# Altium PCB Handheld Logger Bud HH3642 rev2.PcbDoc (part 2 of 2)
Units mil, origin at the board's own origin, x right, y up, seen from the top; angles counter-clockwise.
Board outline 2140 x 3050 mil, 2 copper layers (Top Layer, Bottom Layer); 81 components, 89 nets, 390 pads, 239 vias.
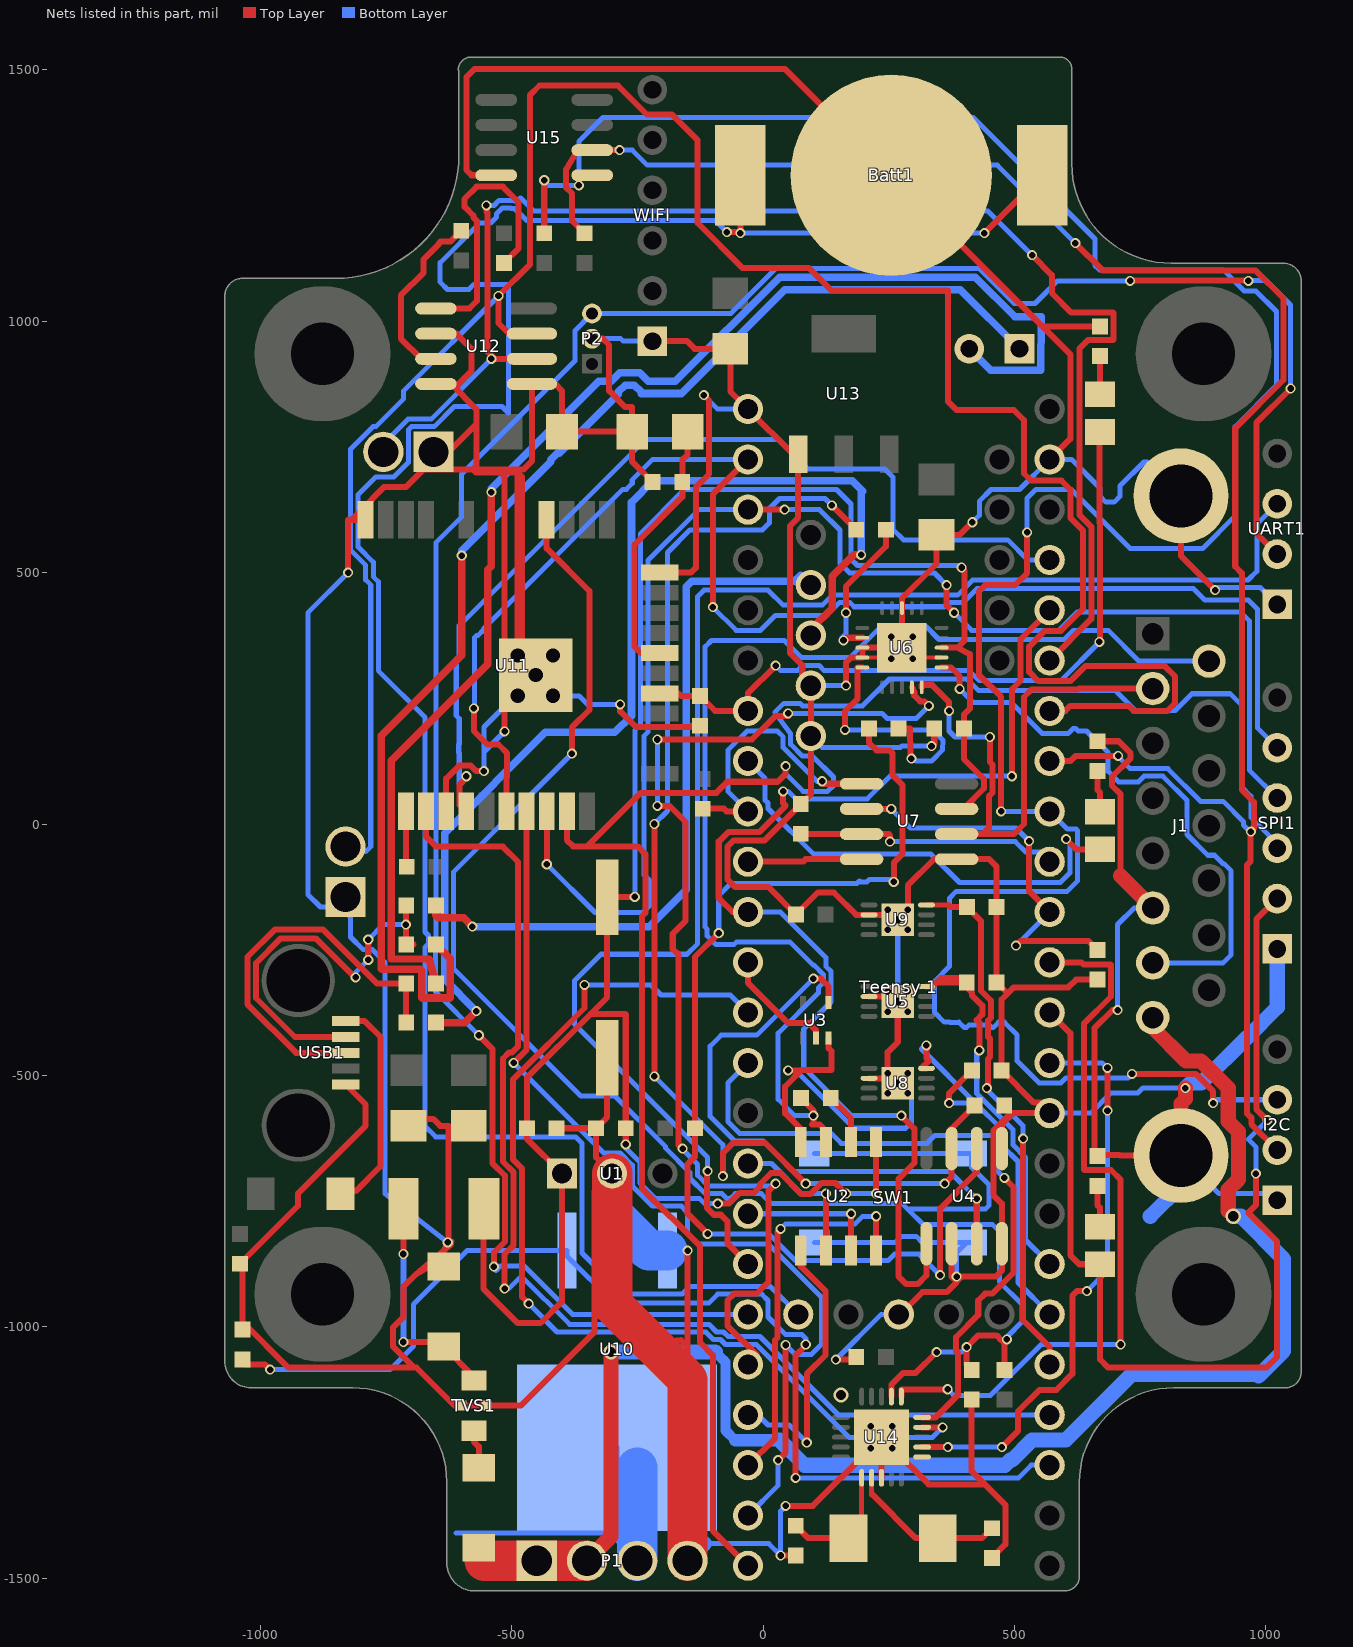
[diagram p2: the nets of this part, all layers, seen from the top]

## Via types
v1: diameter 20, hole 13, Top Layer to Bottom Layer, 226 vias
v2: diameter 50, hole 28, Top Layer to Bottom Layer, 10 vias
v3: diameter 30, hole 20, Top Layer to Bottom Layer, 3 vias

## Nets (pads, with @x,y where several pads share a name; then routed paths per layer and width w, separated by ;. In a path a pad name is that pad's centre, name@x,y a point inside that pad or via, vN(x,y) a via of type N, cw(c..) or ccw(c..) an arc to the next point about the centre after c; other vN are vias at no path point) (continued)
GND: "Teensy 1.14" "Teensy 1.17" "Teensy 1.32" "Teensy 1.78" "Teensy 1.79" "Teensy 1.90" Batt1.2 C1.1 C2.1 C3.2 C4.2 C5.1 C6.1 C7.2 C8.1 C9.1 C10.2 C11.1 C12.1 C13.1 C14.1 C15.1 C16.1 C17.1 I2C.1 J1.6 J1.16 J1.17 P1.4 P2.2 R2.2 R3.2 R7.2 R8.2 R9.2 R11.2 R12.2 R13.2 R17.2 R19.2 R26.2 SPI1.1 SW1.3 SW1.4 SW20.1 SW21.1 TVS1.3 U1.2 U2.8 U3.3 U4.2 U4.4 U4.5 U5.0 U5.2 U6.3 U6.4 U6.12 U6.18 U6.21 U7.5 U8.0 U8.2 U9.0 U9.2 U10.3 U11.9 U11.12 U11.28 U11.29 U12.2 U12.4 U12.5 U13.1 U14.8 U14.21 U15.4 UART1.1 USB1.4 WIFI.1 Z1.1 | length 24703.8
  Top Layer w7.87: U6.4@197.52,330.94 U6.21@254.61,330.94 ; U6.21@297.91,330.94 U6.12@355,330.94
  Top Layer w12: C4.2@-1040,-874.53 -925,-759.53 -925,-735 -790,-600 -790,-557.83 USB1.4@-829.84,-517.99 USB1.4@-837,-517.99 ; C4.2@-1035,-890 -1035,-990 -944,-1081 -693.7,-1081 ; v1(-825,500) -825,604 -824,605 -817.88,605 ; U11.9@-790.24,604.92 -790.24,605 -817.88,605 ; C2.1@-705,-600.12 -705,-586.3 -656,-586.3 -642.19,-600.12 -625,-600.12 v1@-625,-830 ; U12.4@-650.47,875 U12.4@-620,875 ; U12.2@-650.47,975 -610,975 -580,945 -580,900 -605,875 U12.4@-620,875 ; U11.12@-630,25 -630,90 -604,116 -581.3,116 -570.3,105 v1(-555,105) ; v1(-626.95,-832) -633.56,-847.1 ; v1@-619,-830 -620,-831 -620,-835.47 -622.29,-837.43 -633.56,-847.1 ; U15.4@-530.47,1290 -579.5,1290 -590,1300.5 -590,1485 -574,1501 44,1501 Batt1.2@255,1290 555.47,989.53 ; v1(-514,184) -514,254.96 -514,690 -523,699 ; v2(-487.68,254.96) v2(-487.68,334.96) -487.68,698.68 ; U11.29@-479,343.64 -479,690 -487.68,698.68 ; U11.29@-451.97,295.87 -411.1,255 -411.14,254.96 v2(-417.68,254.96) ; C10.2@-410.47,-605 C1.1@-332.03,-605 ; P2.2@-340,965 -318.5,965 -306,952.5 -306,861.3 -273.7,829 -260.12,829 C5.1@-260.12,780 ; C3.2@-310,-464.45 -310,-582.97 C1.1@-332.03,-605 ; -300,-992 -300,-955 U1.2@-300,-695 ; v1(-284,238) -284,224 -253,193 -144,193 -141.53,195.47 R17.2@-125,195.47 ; -222.78,-1032.22 -163.5,-1026 -150,-1039.5 ; WIFI.1@-220,960 -151,960 -135.88,944.88 C17.1@-65,944.88 -65,860 -30,825 60,735 U13.1@70,735 70,609 54,593 54,339.74 78,315.74 78,292 95,275 95,175 95,59.53 R8.2@75,39.53 2.47,-33 -59,-33 -71,-45 -71,-110 -56,-125 10.47,-125 C8.1@65.47,-180 109.22,-136.25 140.62,-136.25 185,-180.63 U9.2@210.83,-180.63 253,-180.63 253,-190.47 U9.0@267.91,-190.47 ; C11.1@-219.53,680 -260.12,720.59 C5.1@-260.12,780 ; U11.28@-205.12,499.8 -143.48,499.8 -133.72,509.56 -133.72,669.36 -107.38,695.7 -107.38,842.38 v1(-117.62,852.62) ; P1.4@-150,-1465 -150,-1105 -150,-1039.5 ; v1(-150,-848.27) -150,-1039.5 ; v1(35.03,-1454.53) C14.1@65,-1454.53 ; v1(45,-1356) 98.92,-1356 v1(213.98,-1240.94) U14.21@235.63,-1219.29 U14.8@235.63,-1300 ; v1(50,-490) 76,-490 ; U2.8@75,-632.13 75,-606.17 44,-575.17 44,-522 76,-490 ; U3.3@130.59,-425.43 130.59,-446 136,-451.41 136,-489 77,-489 76,-490 ; v1(145,-1065) 180.47,-1065 C9.1@185.47,-1060 ; v1(165,275) 165,320.94 175,330.94 U6.4@197.52,330.94 U6.3@197.52,350.63 U6.21@276.26,350.63 U6.18@276.26,429.37 276.26,448.32 345,517.06 C7.2@345,574.88 391,574.88 v1(416.12,600) ; U8.2@210.83,-505.63 U8.0@247.91,-505.63 ; U5.2@210.83,-343.13 258.07,-343.13 U5.0@267.91,-352.97 267.91,-433.59 247.91,-453.59 v1(247.91,-495.47) ; v1(257.28,-1240.94) 329.34,-1313 441,-1313 ; 270,-975 273.1,-975 317.1,-931 365,-931 385,-911 v1@385,-909.53 ; v1(287.91,-170.47) 287.91,-122 339.91,-70 U7.5@385,-70 449.53,-70 464.53,-85 R13.2@464.53,-165 R11.2@464.53,-315 ; v1@340.47,159.53 C6.1@340.47,190 ; U4.2@375,-834.49 v1@375,-900 ; C15.1@415,-1144.53 415,-1287 441,-1313 ; C13.1@455,-1459.53 482,-1432.53 482,-1354 441,-1313 ; R11.2@464.05,-315 R11.2@464.53,-315 ; U4.5@475,-645.51 475,-597.5 497.5,-575 ; 570,725 611,766 611,934 555.47,989.53 ; R3.2@665,-660.47 R3.2@667.24,-658.24 ; R9.2@665,-309.53 622.47,-309.53 607,-325 498.5,-325 486.51,-336.99 ; R2.2@665,164.53 707,164.53 731,140.53 731,130.7 694,93.7 694,76.3 711,59.3 711,-102.89 ; R19.2@670,989.53 555.47,989.53 ; v1(705,-370) 695,-370 659,-406 659,-650 R3.2@667.24,-658.24 ; J1.17@830.91,-659.21 709.72,-659.21 708.75,-658.24 R3.2@667.24,-658.24 ; 830.91,-556.09 840,-547 ; J1.16@830.91,652.6 830.91,533.09 v1(899,465) ; -817.88,605 -776.98,645.89 -776.98,646.88 -753.86,670 -710,670 -675,705 SW21.1@-660,705 ; -693.7,-1081 -736,-1038.7 -736,-1001.48 -715,-980.48 -715,-920.47 -690,-895.47 ; -693.7,-1081 -689,-1081 -613.5,-1156.5 TVS1.3@-600,-1156.5 TVS1.3@-550,-1156.5 -481.5,-1156.5 -335,-1010 -335,-730 U1.2@-300,-695 ; -690,-895.47 -650.65,-861.74 -633.56,-847.1 ; -690,-895.47 -642.5,-867.33 -642.4,-867.28 -633.56,-847.1 ; SW21.1@-660,705 -577,705 ; SW21.1@-660,705 -570,795 ; U12.4@-620,875 -570,825 -570,795 ; -577,705 -529,705 ; -577,705 -571,699 -523,699 ; -577,705 -570,712 -570,795 ; -529,705 -476,705 -459.53,721.47 U12.5@-459.53,875 -413.5,875 -399.88,861.38 C16.1@-399.88,780 C5.1@-260.12,780 ; -529,705 -523,699 ; -523,699 -488,699 -487.68,698.68 ; C1.1@-332.03,-605 -332.03,-662.97 U1.2@-300,-695 ; v1@375,-900 384.76,-909.76 v1@385,-909.53 ; v1@375,-900 v1(385,-900) ; v1@385,-909.53 v1@394.53,-900 ; v1@385,-909.53 v1(385,-900) ; v1(385,-900) v1@394.53,-900 ; v1@394.53,-900 463,-900 475,-888 U4.4@475,-834.49 475,-755 458,-738 458,-609.75 492.75,-575 497.5,-575 ; R11.2@464.53,-315 486.51,-336.99 ; 486.51,-336.99 474.53,-348.97 R12.2@474.53,-490 538.53,-554 570,-554 570,-575 497.5,-575
  Top Layer w30: 711,-102.89 J1.6@775,-166.89 ; J1.17@830.91,-659.21 830.91,-556.09 ; 840,-547 v1(840,-525)
  Top Layer w80: U1.2@-300,-695 -300,-955 -150,-1105 P1.4@-150,-1465
  Bottom Layer w10: v1(-825,500) -905,420 -905,-140 -879.79,-165.21 -840,-165.21 -820.21,-185 -820.21,-224.79 -795,-250 -776.72,-250 -752,-274.72 -752,-735 v1(-626.95,-832) ; v1(-555,105) -555,143 ; v1(-514,184) -555,143 ; v2(-487.68,254.96) v2(-417.68,254.96) -365.96,254.96 -349,238 v1(-284,238) ; U11.29@-479,343.64 -473.36,349.28 -432,349.28 v2(-417.68,334.96) ; U11.29@-451.97,295.87 -555,192.83 -555,143 ; P2.2@-340,965 -283,965 -278,960 WIFI.1@-220,960 ; U10.3@-190,-848.27 v1(-150,-848.27) ; v1(-117.62,852.62) -90,825 -30,825 ; -116,-1431 11.5,-1431 v1(35.03,-1454.53) 35.03,-1365.97 v1(45,-1356) ; v1(50,-490) 65.32,-490 180.32,-605 283.28,-605 295,-593.28 295,-542.56 v1(287.91,-535.47) U8.0@277.83,-525.39 ; 95,175 117.5,152.5 273.13,152.5 275.89,155.26 276.15,155 v1(335,155) 336.51,155 v1@338,153.51 ; 95,275 v1(165,275) ; SW1.4@102.01,-832.17 263.34,-832.17 275.5,-820 304.5,-820 316.66,-832.17 SW1.3@405,-832.17 ; v1(145,-1065) 235,-975 270,-975 ; v1(213.98,-1240.94) v1(257.28,-1240.94) ; v1(213.98,-1197.64) v1(257.28,-1197.64) ; v1(247.91,-535.47) U8.0@267.91,-515.47 ; v1(247.91,-495.47) 274.47,-495.47 281.19,-502.19 U8.0@267.91,-515.47 ; v1(247.91,-372.97) U5.0@267.91,-352.97 ; v1(247.91,-332.97) U5.0@267.91,-352.97 ; v1(254.61,328.98) v1(297.91,328.98) v1(297.91,372.28) v1(254.61,372.28) ; U8.0@287.91,-525.39 U8.0@277.83,-525.39 ; v1(287.91,-170.47) U9.0@267.91,-190.47 U5.0@267.91,-352.97 ; v1(385,-900) 385,-852.17 SW1.3@405,-832.17 ; SW1.3@415,-832.17 SW1.3@405,-832.17 ; v1(416.12,600) 430,613.88 430,641.57 453.43,665 510,665 570,725 613.28,725 670,668.28 670,651.72 681.72,640 698.28,640 710,651.72 710,672.39 757.61,720 763.5,720 J1.16@830.91,652.6 ; 570,-575 651.72,-575 691.72,-535 745.19,-535 755.19,-525 v1(840,-525) ; v1(705,-370) 705,-200 738.11,-166.89 J1.6@775,-166.89 ; J1.17@830.91,-719.09 J1.17@830.91,-659.21 906.69,-735 1009.14,-735 I2C.1@1022.44,-748.31 ; v1(899,465) 904,470 989.14,470 UART1.1@1022.44,436.69 ; U8.0@267.91,-515.47 U8.0@277.83,-525.39 ; U8.0@267.91,-515.47 267.91,-525.39 U8.0@277.83,-525.39
  Bottom Layer w30: P1.4@-150,-1465 -116,-1431 ; 770,-780 J1.17@830.91,-719.09 ; v1(840,-525) 850,-515 871.36,-515 963.05,-423.31 963.69,-423.31 1022.44,-364.56 SPI1.1@1022.44,-248.31
  Bottom Layer w60: -300,-775 U1.2@-300,-695
  Bottom Layer w80: -300,-775 -226.73,-848.27 U10.3@-190,-848.27
  other v1: 247.91,-495.47 287.91,-495.47 287.91,-372.97 287.91,-332.97 247.91,-210.47 287.91,-210.47 247.91,-170.47 -487.68,254.96 -417.68,254.96 -417.68,334.96
  other v3: 155,-1135
"GPS RX": "Teensy 1.41" P2.3 UART1.2 | length 4684.5
  Top Layer w12: v1(-565,-420) -538,-447 -538,-674.44 -513,-699.44 -513,-830.56 -535,-852.56 v1(-535,-880) ; v1(730,1080) 731,1081 964,1081 v1(965,1080) ; UART1.2@1022.44,536.69 981,578.14 981,798 v1(1049,866)
  Bottom Layer w10: v1(-565,-420) -651,-334 -651,-245.5 -650,-244.5 -650,-215.5 -650.5,-215 -650.5,-10.75 -650,-10.25 -650,560 -600,610 -600,695 -374,921 -374,981 P2.3@-340,1015 -64.1,1015 25.9,1105 429.29,1105 499.29,1035 540.71,1035 585.71,1080 v1(730,1080) ; v1(-535,-880) -535,-883.72 -531,-887.72 -522.28,-879 -485,-879 -480,-874 -379,-975 -30,-975 ; v1(965,1080) 966,1081 1000,1081 1049,1032 v1(1049,866)
"GPS TX": "Teensy 1.40" UART1.3 | length 2989.6
  Top Layer w12: v1(-110,-690.3) -111,-691.3 -111,-763.7 -97.7,-777 -84,-777 -71,-790 -71,-834 -30,-875
  Bottom Layer w10: v1(-110,-690.3) -110,-663 -375,-398 -375,-311.72 -322.28,-259 -151,-259 -130,-238 -130,452.5 -117.5,465 10,465 40,435 118,435 138,455 387,455 417,485 964.5,485 982,502.5 982,596.25 UART1.3@1022.44,636.69
"Hst USB_N": "Teensy 1.76" R14.1 | length 1424.5
  Top Layer w15: R14.1@-650.47,-162.33 -650.47,-181.53 -645.47,-186.53 -595.47,-186.53 v1(-578,-204)
  Bottom Layer w15: v1(-578,-204) -226,-204 -152.5,-130.5 -152.5,471.62 -141.62,482.5 62.5,482.5 75,495 95,475
"Hst USB_P": "Teensy 1.77" R15.1 | length 2187.5
  Top Layer w15: R15.1@-650.47,-395 -593,-395 v1(-570,-372) ; 95,375 95,386.82 137.5,429.32 137.5,492.5 180,535 v1(195,535)
  Bottom Layer w15: v1(-570,-372) -633,-309 -633,-252.25 -632.5,-251.75 -632.5,-208.25 -633,-207.75 -633,-18 -433,182 -294.5,182 -261.5,215 -261.5,640.19 -219.19,682.5 177.25,682.5 198,661.75 195,658.75 v1(195,535)
"J1708 RX": "Teensy 1.4" "Teensy 1.29" U4.1 | length 2363.3
  Top Layer w12: -30,-175 -60.5,-175 -88,-147.5 -88,-35 -69,-16 -7.5,-16 45,36.5 40,41.5 v1(40,65) ; v1(275,-580) 301,-606 301,-674 269,-706 269,-899 285,-915 307.5,-915 325,-897.5 U4.1@325,-834.49 ; v1(495,95) 495,268 512,285 512,367 570,425
  Bottom Layer w10: -30,-175 34.5,-175 125,-265.5 125,-283 135,-293 135,-353.99 81,-407.99 81,-484.28 176.72,-580 v1(275,-580) ; v1(40,65) 50,65 65,50 207.5,50 252.5,95 v1(495,95)
"J1708 TX": "Teensy 1.3" U3.2 | length 230.4
  Top Layer w12: -30,-275 -30,-316 49.57,-395.57 90.57,-395.57 105,-410 U3.2@105,-425.43
J1708+: R5.2 U6.5 | length 529.4
  Top Layer w12: v1(163,187) 163,224 188,249 188,311.26 U6.5@197.52,311.26 ; R5.2@269.53,190 292,190 293,138 295,136 v1(295,130)
  Bottom Layer w10: v1(163,187) 337.5,187 358,166.5 357.35,147.35 335,125 304,125 295,134 v1(295,130)
J1708-: R6.2 U6.2 | length 298
  Top Layer w12: v1(160,365) 165.32,370.32 U6.2@197.52,370.32 ; v1(165,420) 165,472.53 244.53,552.06 R6.2@244.53,585
  Bottom Layer w10: v1(160,365) 156,369 165,378 v1(165,420)
LIN: J1.2 U6.10 U7.6 | length 1077.4
  Top Layer w12: U6.10@315.63,271.89 315.63,276 336.5,276 370,242.5 v1(370,225) ; U7.6@385,-20 436.5,-20 ; v1(451,173) 451,123.31 456.31,118 456.31,62.31 449,55 449,-7.5 436.5,-20 ; J1.2@775,269.33 628,269.33 625.67,267 533.5,267 519,252.5 519,0 499,-20 436.5,-20
  Bottom Layer w10: v1(370,225) 370,185 369.8,184.8 381.59,173 v1(451,173)
"LIN1 RX": "Teensy 1.6" R10.1 U7.1 | length 568.2
  Top Layer w12: R10.1@-120,30.47 -78,30.47 -72.53,25 -30,25 ; v1(117.5,85) 122.5,80 U7.1@196.02,80
  Bottom Layer w10: -30,25 -70,65 -70,146.64 -31.64,185 28.28,185 40,173.28 40,152.22 107.22,85 v1(117.5,85)
"LIN1 TX": "Teensy 1.5" U7.4 | length 228.1
  Top Layer w12: -30,-75 80,-75 85,-70 U7.4@196.02,-70
"LIN !WAKE": "Teensy 1.24" R8.1 U7.3 | length 525.3
  Top Layer w12: R8.1@75,-19.53 124.72,-19.53 125.19,-20 U7.3@196.02,-20 250,-20 252.5,-22.5 v1(252.5,-35)
  Bottom Layer w10: v1(252.5,-35) 501.72,-35 522.05,-55.34 550.34,-55.34 570,-75
"LIN CS": "Teensy 1.23" R9.1 U7.2 | length 785.2
  Top Layer w12: U7.2@196.02,30 v1(255,30) ; v1(503,-242) 512,-233 647.53,-233 R9.1@665,-250.47 ; v1(529,-34) 529,-134 570,-175
  Bottom Layer w10: v1(255,30) 293,-8 503,-8 v1(529,-34) ; v1(503,-242) 570,-175
"LIN Switch": "Teensy 1.42" U6.9 | length 2196.3
  Top Layer w12: v1(-210,36) -186,36 -154,4 -154,-192.72 -179.5,-218.22 -179.5,-248.5 -167.78,-260.22 -167.78,-637.78 v1(-160,-645.56) ; v1(-210,168) -22,168 25,215 v1@50.3,215 ; -30,-1075 -11.75,-1056.75 -71,-997.5 -71,-947.5 -57.5,-934 -13,-934 11,-910 11,-729 v1(25,-715) ; U6.9@295.94,271.89 298.63,269.2 298.63,264.85 300.69,262.79 300.69,255.86 312.55,244 321,244 v1(330,235)
  Bottom Layer w10: v1(-210,36) v1(-210,168) ; v1(-160,-645.56) -160,-646.86 -130,-676.86 -130,-698.58 -108.58,-720 24,-720 25,-719 v1(25,-715) ; v1@50.3,215 v1(50,220) 236.72,220 246.72,210 305,210 v1(330,235)
NetBatt1_1: "Teensy 1.15" Batt1.1 | length 4637.8
  Top Layer w12: v1(-72,1177) -46,1177 v1@-45,1178 ; v1(-45,1175) v1@-45,1178 ; Batt1.1@-45,1290 v1@-45,1178 ; v1(440,1175) Batt1.1@555,1290
  Bottom Layer w10: v1(-72,1177) -95,1200 -470,1200 -494,1224 -500.72,1224 -501.72,1225 -518.28,1225 -530,1213.28 -530,1206.72 -541.72,1195 -563,1195 -642,1116 -642,1077.5 -627.5,1063 -585,1063 -575,1073 -507,1073 -506,1072 -506,817 -519,830 -613.79,830 -653.79,790 -699.14,790 -705,784.14 -705,719.29 -734.29,690 -770,690 -805,655 -805,550.71 -775,520.71 -775,491.72 -765,481.72 -765,305 -672,212 -672,-214.72 -665,-221.72 -665,-238.28 -672,-245.28 -672,-601 -651,-622 -373,-622 -360,-635 -360,-853 -278,-935 -161,-935 -146,-920 15,-920 70,-975 ; v1(-45,1175) v1(440,1175)
NetC5_2: C5.2 C11.2 U11.24 | length 526.6
  Top Layer w12: U11.24@-205.12,339.8 -242.61,339.8 -255.3,352.5 -255.3,555.7 -160.47,650.53 C11.2@-160.47,680 -160.47,724 -149.88,734.59 C5.2@-149.88,780
NetC13_2: C13.2 U14.7 X1.1 | length 315.6
  Top Layer w9.84: U14.7@215.94,-1300 215.94,-1332 216.94,-1333
  Top Layer w12: 216.94,-1333 303.94,-1420 X1.1@347.17,-1420 435.47,-1420 C13.2@455,-1400.47
NetC14_2: C14.2 U14.6 X1.2 | length 246
  Top Layer w9.84: X1.2@196.26,-1393.74 U14.6@196.26,-1300
  Top Layer w12: C14.2@65,-1395.47 89.53,-1420 X1.2@170,-1420 X1.2@196.26,-1393.74
NetC15_2: C15.2 R23.2 SW1.1 SW1.2 U11.4 U14.17 | length 3600
  Top Layer w10: v1@475,-1025 v1(485,-1025)
  Top Layer w12: U11.4@-430.24,604.92 -430.24,548.24 -345,463 -345,227 -380,192 v1(-380,140) ; U14.17@255.32,-1138.58 255.32,-1114.68 278.08,-1091.92 303.08,-1091.92 v1(345,-1050) ; C15.2@415,-1085.47 405,-1075.47 v1(405,-1040) 428,-1017 464.41,-1017 473.7,-1026.3 ; v1@478.7,-1031.3 480,-1032.59 R23.2@480,-1085.47
  Bottom Layer w10: v1(-380,140) -615,-95 -615,-288 -362.3,-540.7 -294.59,-540.7 -194.28,-641 -194.28,-644 -145,-693.28 -145,-704.8 -114.8,-735 -81.72,-735 -71.72,-745 -65.5,-745 -55.5,-735 -3.28,-735 16.72,-755 277,-755 288,-766 ; SW1.2@102.01,-655 SW1.1@415,-655 415,-683 449,-717 449,-759 442,-766 288,-766 ; v1(345,-1050) 395,-1050 v1(405,-1040) ; v1(485,-1025) 485,-1020 515,-990 515,-955 470,-910 470,-810 456,-796 318,-796 288,-766
NetD1_1: "Teensy 1.7" D1.1 | length 926.1
  Top Layer w12: v1(602.5,-30) 622.9,-50.4 D1.1@670,-50.4
  Bottom Layer w10: -30,125 4.39,90.61 4.39,47.18 10,41.57 10,31 101,-60 334,-60 390.5,-116.5 591,-116.5 610,-97.5 610,-37.5 v1(602.5,-30)
NetD1_2: D1.2 R2.1 | length 83.1
  Top Layer w12: R2.1@665,105.47 665,68 670,63 D1.2@670,24.4
NetD2_1: "Teensy 1.21" D2.1 SPI1.2 | length 2112.2
  Top Layer w12: 570,-375 611,-416 611,-857.4 629,-875.4 D2.1@670,-875.4 670,-1064.5 686.5,-1081 1001,-1081 1022,-1060 1022,-830 965,-773 980,-758 v1(980,-695) ; v1(1003,-589) 981,-567 981,-189.75 SPI1.2@1022.44,-148.31
  Bottom Layer w10: v1(980,-695) 980,-642 965,-627 v1(1003,-589)
NetD2_2: D2.2 R3.1 | length 83.1
  Top Layer w12: R3.1@665,-719.53 665,-758 670,-763 D2.2@670,-800.6
NetD3_2: D3.2 TVS1.1 | length 77.6
  Top Layer w12: TVS1.1@-575,-1206.5 -575,-1228 -565,-1238 D3.2@-565,-1280
NetD4_1: "Teensy 1.8" D4.1 R17.1 U11.22 | length 1417.8
  Top Layer w12: U11.22@-205.12,259.8 -168,259.8 -162.72,254.53 R17.1@-125,254.53 -95.47,225 -30,225 -30,260 v1(25,315) ; v1(669,362) 670,363 670,597.78 669,598.78 669,778.6 D4.1@670,779.6
  Bottom Layer w10: v1(25,315) 35,305 68.43,305 78.43,315 111.57,315 121.57,305 410,305 430,285 592,285 v1(669,362)
NetD4_2: D4.2 R19.1 | length 76.1
  Top Layer w12: D4.2@670,854.4 R19.1@670,930.47
NetD5_1: D5.1 USB1.1 | length 439.3
  Top Layer w12: D5.1@-840,-730 -810,-730 -760.6,-680.6 -760.6,-423.41 -792,-392.01 USB1.1@-829.84,-392.01
NetI2C_2: "Teensy 1.26" I2C.2 R22.2 U15.6 | length 3991.9
  Top Layer w10: 970,-43 v1(970,-15)
  Top Layer w12: R22.2@-355,1174.53 -379.8,1199.33 -379.8,1254.1 -391.87,1266.17 -391.87,1301.13 -369,1340 U15.6@-339.53,1340 v1(-285,1340) ; 570,125 611,125 621.61,135.61 v1(706.22,135.61) ; v1(621,1155) 675.15,1100.85 721.15,1100.85 721.3,1101 738.7,1101 738.85,1100.85 811.63,1100.85 811.79,1101 979,1101 1035,1045 1035,883 939,787 939,512 952,499 952,67.7 976,43.7 976,-9 v1(970,-15) ; v1@969.7,-15 969.7,-74.04 962,-81.74 962,-575.14 971,-584.14 971,-596.86 I2C.2@1022.44,-648.31
  Bottom Layer w10: v1(-285,1340) -260,1340 -230,1310 466,1310 v1(621,1155) ; v1(706.22,135.61) 706.22,133.78 730,110 805,110 870,45 915,45 955,5 955,-2.08 v1@968.96,-16.04
NetI2C_3: "Teensy 1.25" I2C.3 R1.2 U15.5 | length 5171
  Top Layer w12: R1.2@-435,1174.53 v1(-435,1280) ; v1(-366,1270) -366,1290 U15.5@-339.53,1290 ; v1(473.31,25) 473.31,252.69 429,297 429,462 442,475 501,475 525,499 v1(525,580) ; v1(733.69,-497) 860.4,-497 895,-531.6 v1(895,-555)
  Bottom Layer w10: v1(-435,1280) -435,1277 -428,1270 v1(-366,1270) -366,1357.5 -318.5,1405 418.28,1405 660,1163.28 660,1110.5 668.65,1101.85 914.87,1101.85 956.72,1060 980.02,1060 1021,1019.02 1021,872 939,790 939,612.92 874.08,548 730,548 613,665 542.5,665 525,647.5 v1(525,580) ; v1(473.31,25) 570,25 605,-10 622.22,-10 625,-12.78 625,-113.66 604.66,-134 384.5,-134 371,-147.5 371,-283 341.37,-312.63 341.37,-374.87 360.47,-393.97 370.69,-393.97 371.72,-395 388.28,-395 389.31,-393.97 389.48,-393.97 400.5,-405 404.29,-405 409.29,-400 450.71,-400 455.71,-405 457.56,-405 468.59,-393.97 479.68,-393.97 505,-419.29 505,-471 549,-515 592,-515 602,-505 725.69,-505 v1(733.69,-497) ; v1(895,-555) 901.69,-548.31 I2C.3@1022.44,-548.31
NetP1_3: P1.3 U10.2 | length 647.8
  Bottom Layer w10: -610,-1410 -305,-1410 P1.3@-250,-1465 ; U10.2@-290,-1240 -290,-1280 U10.2@-250,-1280
  Bottom Layer w80: P1.3@-250,-1465 U10.2@-250,-1280
NetPTC1_1: PTC1.1 TVS1.2 Z1.2 | length 441.1
  Top Layer w12: v1(-715,-1030) -644,-1030 Z1.2@-635,-1039 -575,-1099 TVS1.2@-575,-1106.5 ; v1(-715,-855) PTC1.1@-715,-765
  Bottom Layer w12: v1(-715,-1030) v1(-715,-855)
NetR4_2: R4.2 R5.1 U4.6 | length 2222.7
  Top Layer w12: v1(-110,-815) -150,-775 -150,-676.56 -146.3,-672.86 -135.47,-662.03 R4.2@-135.47,-605 -135.47,-264.47 v1(-88,-217) ; R5.1@210.47,190 210.47,161.78 226,146.25 251.4,146.25 257,140.65 257,97.89 277,77.89 277,-60 260,-77 v1(260,-115) ; v1(352,-897) 352,-765 425,-692 U4.6@425,-645.51
  Bottom Layer w10: v1(-110,-815) 11.5,-815 64.26,-867.76 248.96,-867.76 261.72,-855 310,-855 v1(352,-897) ; v1(-88,-217) -88,-142.5 -63.5,-118 187,-118 192,-113 194,-115 206.72,-115 211.72,-110 255,-110 v1(260,-115)
NetR6_1: R6.1 R7.1 U4.7 | length 2477.5
  Top Layer w12: v1(-216,-501.75) v1(-216,0) ; v1(-80,-700) -80,-654.64 -59.36,-634 4,-634 v1(85,-715) ; v1(136.76,633.71) R6.1@185.47,585 ; v1(361,-715) 375,-701 U4.7@375,-645.51 375,-605.47 R7.1@420.47,-560
  Bottom Layer w10: v1(-216,-501.75) -80,-637.75 v1(-80,-700) ; v1(-216,0) -190,26 -190,540 -145,585 -1,585 13,599 13,627.5 32.67,647.17 123.3,647.17 v1(136.76,633.71) ; v1(85,-715) v1(361,-715)
NetR11_1: "Teensy 1.51" R11.1 U5.8 | length 786.1
  Top Layer w12: U5.8@325,-323.44 337,-323.44 345.44,-315 ; R11.1@405,-315 R11.1@395.47,-315 ; v1(430,-450) 430,-394.7 425,-389.7 436,-378.7 436,-361.3 416,-341.3 416,-335.53 R11.1@395.47,-315 ; 345.44,-315 353.87,-306.58 387.05,-306.58 R11.1@395.47,-315 ; 345.44,-315 R11.1@395.47,-315
  Bottom Layer w10: v1(430,-450) 425,-455 425,-535.94 497,-607.94 497,-638 522,-663 522,-827 570,-875
NetR12_1: "Teensy 1.50" R12.1 U8.8 | length 846.9
  Top Layer w12: U8.8@325,-485.94 315,-485.94 330,-470.94 325,-465.94 v1(325,-440) ; v1(370,-555) 370,-535.47 R12.1@415.47,-490
  Bottom Layer w10: v1(325,-440) 322.42,-440 315,-447.42 422.58,-555 ; v1(370,-555) 422.58,-555 ; 570,-975 506.81,-911.81 506.81,-671.05 475.43,-639.67 475.43,-607.85 422.58,-555
NetR13_1: "Teensy 1.49" R13.1 U9.8 | length 1075.2
  Top Layer w9.84: U9.8@325,-160.94 368.11,-160.94
  Top Layer w12: 368.11,-160.94 372.17,-165 R13.1@405.47,-165 433,-192.53 433,-331 453,-351 453,-385.74 447.78,-390.96 447.78,-423.08 451,-426.3 451,-463.7 447.78,-466.92 447.78,-527.78 v1(445,-525) ; v1(517,-625.5) 517,-987 570,-1040 570,-1075
  Bottom Layer w10: v1(445,-525) 445,-527.78 517,-599.78 v1(517,-625.5)
NetR14_2: R14.2 R24.2 USB1.2 | length 843.1
  Top Layer w12: USB1.2@-829.84,-423.5 -930.69,-423.5 -1008.17,-346.03 -1008.17,-276.57 -959.06,-227.46 -927.54,-227.46 -889.6,-227.47 v1@-811.03,-306.04 ; v1(-785,-270) v1(-785,-230) ; v1(-710,-200) -710,-224.78 R24.2@-709.53,-225.25 ; R14.2@-709.53,-162.33 R24.2@-709.53,-225.25 ; R24.2@-709.53,-225.25 R24.2@-709.53,-239.89 -694.89,-239.89 R24.2@-709.53,-225.25
  Bottom Layer w10: v1@-810,-307.07 v1(-810,-305) -810,-295 v1(-785,-270) ; v1(-785,-230) -755,-200 v1(-710,-200)
NetR15_2: R15.2 R25.2 USB1.3 | length 789.5
  Top Layer w12: USB1.3@-829.84,-455 -928.5,-455 -1025.17,-358.33 -1025.17,-264.5 -970.67,-210 -874.7,-210 -767.25,-317.44 R25.2@-709.53,-317.44 R15.2@-709.53,-395
NetR16_1: R16.1 U11.10 | length 110.7
  Top Layer w12: U11.10@-710,25 -710,-83.38 R16.1@-708.38,-85
NetR18_2: R18.2 U12.1 | length 565
  Top Layer w12: U12.1@-650.47,1025 -584,1025 -569,1040 -569,1199.3 -576,1206.3 -576,1210 -593.15,1227.15 -593.6,1226.7 -593.6,1243.04 -569.45,1267.19 -517.19,1267.19 -485.85,1235.85 -485.85,1144.63 R18.2@-515,1115.47
NetR20_2: R20.2 U12.3 | length 332.3
  Top Layer w12: U12.3@-680,925 -720,965 -720,1051 -675,1096 -675,1122.66 -644.1,1153.56 -644.1,1155.03 -641.13,1158 -621.53,1158 R20.2@-600,1179.53
NetR21_1: R21.1 U2.6 | length 103.9
  Top Layer w12: R21.1@134.53,-545 175,-585.47 U2.6@175,-632.13
NetR26_1: "Teensy 1.62" R26.1 U10.1 | length 2179.3
  Top Layer w12: R26.1@-1030,-1074.53 -990.47,-1074.53 v1(-980,-1085) ; v1(65,-1300) 65,-1056.56 85.56,-1036 85,-1035.44 v1(85,-1035)
  Bottom Layer w10: v1(-980,-1085) -741.72,-1085 -695,-1038.28 -695,-955 -588.27,-848.27 U10.1@-390,-848.27 -390,-859 -297,-952 -107,-952 -90,-935 -2.5,-935 10,-947.5 10,-980.37 45.19,-1015.56 77.63,-1015.56 85,-1022.94 v1(85,-1035) ; v1(65,-1300) 508.21,-1300 533.21,-1275 570,-1275
NetSPI1_3: "Teensy 1.46" SPI1.3 U11.18 | length 3853.9
  Top Layer w12: U11.18@-390,25 -390,-32 -377.5,-44.5 -349.5,-44.5 ; -30,-1475 -99,-1406 -99,-1057 -125,-1031 -125,-840 -241,-724 -241,-184 -234,-177 -234,-60 -249.5,-44.5 -349.5,-44.5 ; v1(45,115) 45,100 29,84 -71,84 -93,62 -243,62 -349.5,-44.5
  Bottom Layer w10: v1(45,115) 45,100 80,65 128.28,65 140,76.72 140,93.28 98.28,135 78.43,135 55,158.43 55,179.5 23.5,222 41.5,240 73.43,240 78.43,235 197.95,235 251.45,288.5 405.29,288.5 428.79,265 701,265 740,226 820,226 853,259 929,259 951,237 951,74.43 970,55.43 970,13.28 1022.44,-39.16 SPI1.3@1022.44,-48.31
NetSPI1_4: "Teensy 1.12" SPI1.4 U11.17 | length 2847.1
  Top Layer w12: v1(-430,-80) U11.17@-430,25 ; -30,625 v1(43,625) ; v1(365,475) 365,435 v1(380,420)
  Bottom Layer w10: v1(-430,-80) -334,-176 -238.5,-176 -225,-162.5 -225,-112.33 -236.24,-101.09 -236.24,175.34 -229,182.57 -229,524 -128,625 -30,625 ; v1(43,625) 112.5,625 153,584.5 153,518.19 172.19,499 341,499 v1(365,475) ; v1(380,420) 415,385 588,385 625,422 949,422 967,404 967,107.14 SPI1.4@1022.44,51.69
NetSPI1_5: "Teensy 1.13" SPI1.5 U11.15 | length 2857.7
  Top Layer w12: v1(-575,230) -575,185 -548,158 -526,158 -508.64,140.64 -508.64,93 -510,91.64 U11.15@-510,25 ; v1(-99.72,431.22) -99.72,655.28 -30,725
  Bottom Layer w10: v1(-575,230) -574,231 -574,370.37 -569.79,374.58 -567.13,374.58 -555,386.72 -555,389.37 -278.79,665.58 -271.72,665.58 -260,677.3 -260,684.37 -219.37,725 -30,725 ; v1(-99.72,431.22) -53.5,385 -5,385 25,415 126.72,415 151.72,440 173.28,440 181.28,432 359.72,432 367.72,440 397.5,440 425.5,468 856,468 879,445 965.41,445 982.91,427.5 982.91,191.22 SPI1.5@1022.44,151.69
NetSW20_2: "Teensy 1.27" SW20.2 U12.7 | length 4625.3
  Top Layer w12: U12.7@-459.53,975 -505,975 -526,996 v1(-526,1050) -463,1113 -463,1450 -444.5,1468.5 -288.5,1468.5 -230.65,1410.65 -180.65,1410.65 -130,1360 -130,1195 -41,1106 91,1106 136,1061 367,1061 368,1060 368,840 385,823 499,823 519,803 519,697 533,683 593,683 611,665 611,608.7 636,583.7 636,427.5 592.5,384 560.5,384 529,352.5 529,302.5 547.5,284 611,284 641,314 799,314 819.27,293.73 819.27,240 804.33,225.06 737,225.06 727.06,235 611,235 601,225 570,225
  Bottom Layer w10: SW20.2@-835,-55 -790,-55 -780,-45 -780,475.5 -790,485.5 -790,514.5 -820,544.5 -820,745.71 -775.71,790 -770,790 -714.61,845.39 -714.61,861.39 v1(-526,1050)
NetSW21_2: "Teensy 1.28" SW21.2 U12.6 | length 2855.2
  Top Layer w12: v1(-550,1230) -550,1217.5 -548,1215.5 -548,940 v1@-533,925 ; v1(-540,925) v1@-533,925 ; U12.6@-459.53,925 v1@-533,925 ; v1(535,1131) 574.5,1091.5 574.5,1055.8 613.3,1017 695.75,1017 696.75,1016 696.75,963 695.75,962 646,962 629,945 629,614.74 653,590.74 653,408 570,325
  Bottom Layer w10: SW21.2@-766,745 -706,805 -660,805 v1(-540,925) ; v1(-550,1230) -535,1230 -525,1240 -495.5,1240 -494.5,1239 -488.15,1239 -482.15,1245 -456.15,1219 447,1219 v1(535,1131)
"NetTeensy 1_1": "Teensy 1.1" U14.15 | length 1364.5
  Top Layer w12: U14.15@316.34,-1179.92 343.08,-1179.92 388,-1135 388,-1052.7 384,-1048.7 384,-1020 428,-976 428,-947.5 441.5,-934 456,-934 498,-892 498,-722 v1(479.79,-703.79)
  Bottom Layer w10: -30,-475 -70,-515 -70,-591.57 -46.57,-615 135.5,-615 155.5,-635 326,-635 342,-619 455.56,-619 458.19,-621.64 458.19,-682.19 v1(479.79,-703.79)
"NetTeensy 1_2": "Teensy 1.2" U14.14 | length 2035.4
  Top Layer w12: v1(-466,-953.5) -479,-940.5 -479,-685.36 -497,-667.36 -497,-507.96 -355,-365.96 v1(-355,-320) ; U14.14@316.34,-1199.61 v1(357,-1199.61)
  Bottom Layer w10: v1(-466,-953.5) -409.5,-1010 -113.79,-1010 -98.79,-1025 -84.64,-1025 -74.64,-1035 -13.43,-1035 171.57,-1220 336.61,-1220 v1(357,-1199.61) ; v1(-355,-320) -222.97,-320 -202.98,-339.99 -65.01,-339.99 -30,-375
"NetTeensy 1_20": "Teensy 1.20" U14.12 | length 1150.1
  Top Layer w12: U14.12@316.34,-1238.98 v1(367.48,-1238.98) ; v1(475,-1238.98) 506.75,-1207.23 506.75,-1168.25 550,-1125 583.5,-1125 615,-1093.5 615,-938 624,-929 v1(644,-929) ; v1(685,-570) v1(685,-485)
  Bottom Layer w10: v1(367.48,-1238.98) v1(475,-1238.98) ; 570,-475 674,-475 684,-485 v1(685,-485) ; v1(644,-929) 685,-888 v1(685,-570)
"NetTeensy 1_22": "Teensy 1.22" U14.16 | length 1460.1
  Top Layer w12: U14.16@275,-1138.58 275,-1124 v1(367,-1124) ; 570,-275 633,-275 637,-279 691,-279 692,-280 692,-343 638,-397 638,-687 639,-688 692,-688 711,-707 v1(711,-1035)
  Bottom Layer w10: v1(367,-1124) 379,-1136 452.43,-1136 553.43,-1035 v1(711,-1035)
"NetTeensy 1_30": "Teensy 1.30" U11.13 | length 1907.6
  Top Layer w12: U11.13@-590,25 -603.25,38.25 -603.25,78.25 -590,91.5 v1(-590,95)
  Bottom Layer w10: v1(-590,95) -604,81 -604,140.72 -605,141.72 -605,158.28 -604,159.28 -604,209.5 -610,215.5 -610,327.82 -604,333.82 -604,394.28 -233.28,765 30.09,765 88.99,706.1 242.13,706.1 258.23,690 258.23,586.27 279.5,565 486.57,565 526.57,525 570,525
"NetTeensy 1_38": "Teensy 1.38" U2.2 | length 292.7
  Top Layer w12: U2.2@125,-847.87 v1(125,-735)
  Bottom Layer w10: -30,-675 16.72,-675 76.72,-735 v1(125,-735)
"NetTeensy 1_39": "Teensy 1.39" U2.3 | length 277.9
  Top Layer w12: U2.3@175,-847.87 v1(175,-775)
  Bottom Layer w10: -30,-775 v1(175,-775)
"NetTeensy 1_45": "Teensy 1.45" U11.16 | length 1916.5
  Top Layer w12: v1(-496,-474.96) -470,-448.96 U11.16@-470,25 ; v1(30,-1265) 45,-1250 v1(45,-1036)
  Bottom Layer w10: v1(-496,-474.96) -316.71,-654.25 -284.03,-654.25 -260,-678.28 -260,-720 -220,-760 -162.5,-760 -150,-772.5 -150,-815 -130,-835 10.29,-835 116,-940.71 116,-1035 96,-1055 64,-1055 v1(45,-1036) ; -30,-1375 30,-1315 v1(30,-1265)
"NetTeensy 1_63": "Teensy 1.63" U11.11 | length 2343
  Top Layer w12: U11.11@-670,25 -670,-25 -650,-45 -517.5,-45 -487,-75.5 -487,-441.92 -499.04,-453.96 -504.7,-453.96 -517,-466.26 -517,-671.4 -496,-692.4 -496,-837.6 -514,-855.6 v1(-514,-924)
  Bottom Layer w10: v1(-514,-924) -505.5,-924 -480.5,-899 -384.5,-995 -107.57,-995 -92.57,-1010 -78.43,-1010 -69.43,-1019 -6,-1019 150,-1175 570,-1175
NetU3_4: U3.4 U4.3 | length 1156.2
  Top Layer w12: v1(100,-307.5) 115,-307.5 130.59,-323.09 U3.4@130.59,-354.57 ; U4.3@425,-834.49 v1(425,-745)
  Bottom Layer w10: v1(100,-307.5) -12.5,-420 -83.28,-420 -105,-441.72 -105,-581.72 -56.72,-630 0,-630 61,-691 371,-691 v1(425,-745)
NetU14_11: U14.11
RAW: D3.1 J1.8 P1.1 P1.2 | length 3090.2
  Top Layer w12: D3.1@-565,-1439 -565,-1465 D3.1@-554,-1465 ; v3@925,-768.96 935,-778.96 v3(935,-780)
  Top Layer w30: P1.2@-350,-1465 -302,-1417 v3(-302,-1050) ; J1.8@775,-385 775,-405 841,-471 871.17,-471 925,-524.83 925,-591.4 945.39,-611.79 945.39,-706.63 925,-727.03 v3@925,-768.96
  Top Layer w80: D3.1@-554,-1465 P1.1@-450,-1465 P1.2@-350,-1465
  Bottom Layer w20: -95,-1050 -85.35,-1059.65 -84.97,-1059.65 -76.18,-1068.43 -76.18,-1068.82 -75,-1070 -75,-1205.5 -55.5,-1225
  Bottom Layer w25: -55.5,-1225 32.8,-1225 ; 729.5,-1097.5 985.5,-1097.5
  Bottom Layer w30: v3(-302,-1050) -95,-1050 ; 32.8,-1225 82.8,-1275 481.4,-1275 491.4,-1265 ; 495,-1265 535,-1225 602,-1225 729.5,-1097.5 ; v3(935,-780) 950,-780 1035,-865 1035,-1048 985.5,-1097.5
"Safe 12V": C1.2 C3.1 C6.2 C10.1 PTC1.2 U1.1 U2.5 U6.13 U7.7 | length 4508.5
  Top Layer w12: PTC1.2@-555,-765 -556,-766 -556,-924 -487.5,-992.5 -442.5,-992.5 -400,-950 U1.1@-400,-695 -469.53,-625.47 C10.1@-469.53,-605 -469.53,-504.53 -343,-378 ; v1(-272.97,-637.03) C1.2@-272.97,-605 -272.97,-379 -273.97,-378 -343,-378 ; v1(-255,-145) -310,-145 C3.1@-310,-145.55 -310,-345 -343,-378 ; v1(-90,-755) -67.98,-755 -46.98,-734 -19,-734 -6,-721 -6,-716.3 16.3,-694 34.3,-694 76.3,-736 94.3,-736 116.3,-714 144,-714 v1(165,-735) ; v1(225,-735) U2.5@225,-632.13 ; U6.13@355,350.63 386.63,350.63 ; U7.7@385,30 398.76,30 439.31,70.55 439.31,89.45 399.53,129.23 C6.2@399.53,190 399.53,217.6 412,230.07 412,337.63 386.63,350.63 ; v1(395,510) 401,504 401,365 386.63,350.63
  Bottom Layer w10: v1(-272.97,-637.03) -272.97,-644.1 -245,-672.07 -245,-713.79 -213.79,-745 -126.01,-745 -111.01,-760 -106.01,-755 v1(-90,-755) ; v1(-255,-145) -255,187 -244,198 -244,577 -156,665 146.17,665 175,636.17 175,526.72 187.72,514 391,514 v1(395,510) ; v1(165,-735) v1(225,-735)
SHLD/LIN: J1.7 U6.11 | length 1167.4
  Top Layer w12: U6.11@355,311.26 374,311.26 391,294.26 v1(391,268.5)
  Bottom Layer w10: v1(391,268.5) 417.5,242 493,242 555,180 606.72,180 616.72,190 621.72,190 626.72,185 643.28,185 686.22,142.07 686.22,104.64 707.27,83.59 746.18,83.59 757.59,95 795,95 843,47 843,-20.69 884.46,-62.14 897.86,-62.14 915.72,-80 918,-80 931,-93 931,-260 915.06,-275.94 J1.7@775,-275.94
SWCAN: J1.9 R21.2 U2.7 | length 2421.5
  Top Layer w12: R21.2@75.47,-545 100,-569.53 v1(100,-580) 100,-595.46 97.81,-597.65 112.65,-597.65 125,-610 U2.7@125,-632.13
  Bottom Layer w10: v1(100,-580) 64.5,-580 63.5,-581 30,-547.5 30,-416 110,-336 110,-325.78 120,-315.78 120,-299.22 100.78,-280 99,-280 54,-235 -53,-235 -58,-240 -93.5,-240 -111,-222.5 -111,-209 -115,-205 -115,352.5 -102.5,365 42.5,365 76.06,331.44 173.44,331.44 235,393 324,393 350,367 599,367 617,385 686.5,385 747.64,323.86 J1.9@886.81,323.86
SWCANRX: "Teensy 1.44" U2.4 | length 765.2
  Top Layer w12: -30,-1275 24,-1221 24,-1026 29,-1021 29,-811 v1(35,-805) ; U2.4@225,-847.87 v1(225,-780)
  Bottom Layer w10: v1(35,-805) 45,-795 183.28,-795 198.28,-780 v1(225,-780)
SWCANTX: "Teensy 1.43" U2.1 | length 557.9
  Top Layer w12: U2.1@75,-847.87 75,-879.5 124.5,-929 124.5,-1055.8 87,-1093.3 v1(87,-1230)
  Bottom Layer w10: -30,-1175 -10,-1175 10,-1195 52,-1195 v1(87,-1230)
"USB D_N": P3.1 R24.1 | length 2600.8
  Top Layer w15: R24.1@-650.47,-239.89 -622,-268.36 -622,-345 -623,-346 -678,-346 -679,-345 -679,-291.48 -681.48,-289 -758,-289 -759,-288 -759,175.28 -599,335.28 v1(-599,533.8)
  Bottom Layer w15: v1(-599,533.8) -599,543.5 -422.5,720 -422.5,724.32 -409.32,737.5 -405,737.5 -287.5,855 -287.5,859.32 -274.32,872.5 -255.68,872.5 -242.5,859.32 -242.5,856 -163,856 43.5,1062.5 392.5,1062.5 P3.1@510,945
"USB D_P": P3.2 R25.1 | length 2723.9
  Top Layer w15: R25.1@-650.47,-317.44 -663.5,-269 -739,-268 -739,125.76 -547.5,317.26 -547.5,505.18 -540.18,512.5 -540,512.5 v1(-540,660)
  Bottom Layer w15: v1(-540,660) -540,667 -327,880 -302.18,880 -284.68,897.5 -245.32,897.5 -227.82,880 -174.36,880 33.14,1087.5 422.04,1087.5 501.04,1008.5 553,1008.5 552,902 453,902 P3.2@410,945
pads on no net: "Teensy 1.0" "Teensy 1.16" "Teensy 1.18" "Teensy 1.19" "Teensy 1.31" "Teensy 1.35" "Teensy 1.36" "Teensy 1.37" "Teensy 1.61" "Teensy 1.88" "Teensy 1.91" U3.1 U6.14 U6.15 U6.16 U6.17 U7.8 U11.1 U11.2 U11.3 U11.5 U11.6 U11.7 U11.8 U11.21 U11.25 U11.26 U11.27 U14.1 U14.2 U14.3 U14.4 U14.5 U14.9 U14.10 U14.13 U15.1 U15.2 U15.3 U15.7 USB1.0 USB1.5 WIFI.2 WIFI.3 WIFI.6

## Polygon pours and split planes (outlines as drawn)
GND on Bottom Layer "GND_L02_P000" (solid, remove dead copper, pour order 0): -1115,1615 -1085,1585 1275,1585 1275,-1555 1220,-1610 -1190,-1610
GND on Top Layer "GND_L01_P002" (solid, remove dead copper, pour order 2): -1210,1685 980,1685 1130,1535 1120,1525 1120,-1675 -980,-1675 -1095,-1560

## Keep-outs
Keep-Out Layer:
  lines w5: -606,1499 cw(c-580,1499) -580,1525 590,1525 cw(c590,1501) 614,1501 614,1312.63 ccw(c811.63,1312.63) 811.63,1115 1035,1115 cw(c1035,1080) 1070,1080 1070,-1090 cw(c1039,-1090) 1039,-1121 817,-1121 ccw(c817,-1309) 629,-1309 629,-1496 cw(c600,-1496) 600,-1525 -573.09,-1525 cw(c-573.09,-1469.09) -629,-1469.09 -629,-1308.32 ccw(c-816.32,-1308.32) -816.32,-1121 -1018.02,-1121 cw(c-1018.02,-1069.02) -1070,-1069.02 -1070,1050 cw(c-1035,1050) -1035,1085 -849.7,1085 ccw(c-849.7,1330.06) -604.64,1330.06 ; -605.24,1499.02 -605.09,1330.28

## Other copper
Top Layer:
  rectangle net GND: -535,180 -400,500
  rectangle net 3V3: -5,865 90,1085
  rectangle net 3V3: 50,790 345,1050
  pour cut-out: -1335,785 -1120,785 -605.09,785 -650.47,-240.21 -796.22,-240.21 -1360,-255
Bottom Layer:
  rectangle net GND: 240,-235 300,-135
  rectangle net GND: 235,-560 300,-475
  rectangle net GND: 235,-385 300,-300
  rectangle net NetP1_3: -670,-1130 -565,-970
  rectangle net NetP1_3: -610,-1410 -475,-1000
  rectangle net 3V3: 50,790 345,1050
  pour cut-out: -1357.37,1022.37 -1120,785 -605.09,785 -580,-233 -1345.16,-233

## Silkscreen, mask and mechanical layers (free items; w line width, h text height)
Top Overlay:
  text "TX" at -160,1345 h30
  text "RX" at -160,1245 h30
  text "D+" at 380,1010 h40
  text "D-" at 500,1010 h40
  text "GND" at -260,865 h30
  text "GND" at -690,805 h30
  text "ATWINC1500-MR210PA" at -1035,455 h40
  text "1" at 775,433.39 h30
  text "SWCAN" at 935,318.39 h25
  text "LIN" at 820,258.39 h25
  text "CAN2L" at 935,193.39 h25
  text "CAN1H" at 820,148.39 h25
  text "CAN1L" at 820,38.39 h25
  text "CAN0L" at 932,-6.61 h25
  text "CAN2H" at 820,-71.61 h25
  text "CAN0H" at 935,-111.61 h25
  text "GND" at -970,-165 h30
  text "UX60 SC-MB 5S8" at -1050,-175 h30 r270
  text "GND" at 820,-176.61 h25
  text "1708-" at 925,-211.61 h25
  text "GND" at 825,-286.61 h25
  text "1708+" at 935,-341.61 h25
  text "VBatt" at 820,-396.61 h25
  text "8" at 760,-461.61 h25
  text "+V" at -485,-1400 h40
  text "+V" at -388,-1400 h40
  text "SW" at -291,-1400 h40
  text "GND" at -200,-1400 h40
Bottom Overlay:
  lines w10: -150,-1465 -115,-1465 -80,-1430 5,-1430 10,-1425
  text "TX" at -125.43,1345 h30
  text "RX" at -125.43,1245 h30
  text "JST PH" at -300,1045 h30
  text "RX" at -375.43,1000 h30
  text "D_P" at 444.57,975 h30
  text "D_N" at 579.57,975 h30
  text "GND" at -375.43,950 h30
  text "GND" at -95.43,945 h30
  text "GND" at -630,904.57 h40 r90
  text "D21" at -740,899.57 h40 r90
  text "3.3V" at -375.43,895 h30
  text "GND" at -75,810 h30
  text "Fits Bud HH-3642" at -965,770 h40 r90
  text "3.3V" at 960,750 h30
  text "GND" at 689.57,705 h30
  text "RX" at 955,515 h30
  text "1" at 771.63,438.39 h30
  text "GND" at 959.57,415 h30
  text "9" at 895,375 h30
  text "Handheld Teensy 3.6 Logger / CAN, J1939, J1708, SWCAN, LIN / with Security and WiFi, V2 / University of Tulsa / J. Daily - December 2017" at -445,370 h40 r90
  text "D20" at 719.17,365 h25
  text "SWCAN" at 836.63,308.39 h25
  text "LIN" at 719.17,257.72 h25
  text "GND" at 195,210 h30
  text "CAN1L" at 836.63,208.39 h25
  text "CAN2H" at 719.17,153.39 h25
  text "D21" at 836.63,95 h25
  text "CAN2L" at 719.17,43.39 h25
  text "CAN0L" at 836.63,-16.61 h25
  text "D20" at -895.43,-55 h40
  text "CAN1H" at 730,-75 h25
  text "CAN0H" at 836.63,-121.61 h25
  text "GND" at -890.43,-165 h40
  text "GND" at 719.17,-176.61 h25
  text "1708-" at 836.63,-231.61 h25
  text "GND" at 960,-290 h25
  text "SHLD" at 719.17,-291.61 h25
  text "1708+" at 835,-345 h25
  text "VBat" at 719.17,-401.61 h25
  text "15" at 925,-405 h25
  text "8" at 786.63,-456.61 h25
  text "GND" at 964.57,-768.31 h30
  text "N-FET: BTS141TC" at -545,-795 h40 r90
  text "PTS645" at 305,-915 h40
  text "GND" at 125,-1420 h40
  text "RAW" at -505,-1485 h40

## Dimensions
876,935 to -876,935 on Mechanical 13
876,935 to 876,-935 on Mechanical 13

## Text inside footprints (layer, text, board x,y; h text height)
C3: Top Overlay "+" at -255,-55 h60 r90
U1: Top Overlay "TAB" at -242,-1225 h40 r180; Top Overlay "GND" at -240,-820 h40 r180